# EAGLE board Player_v0.2 (EAGLE 6.2)
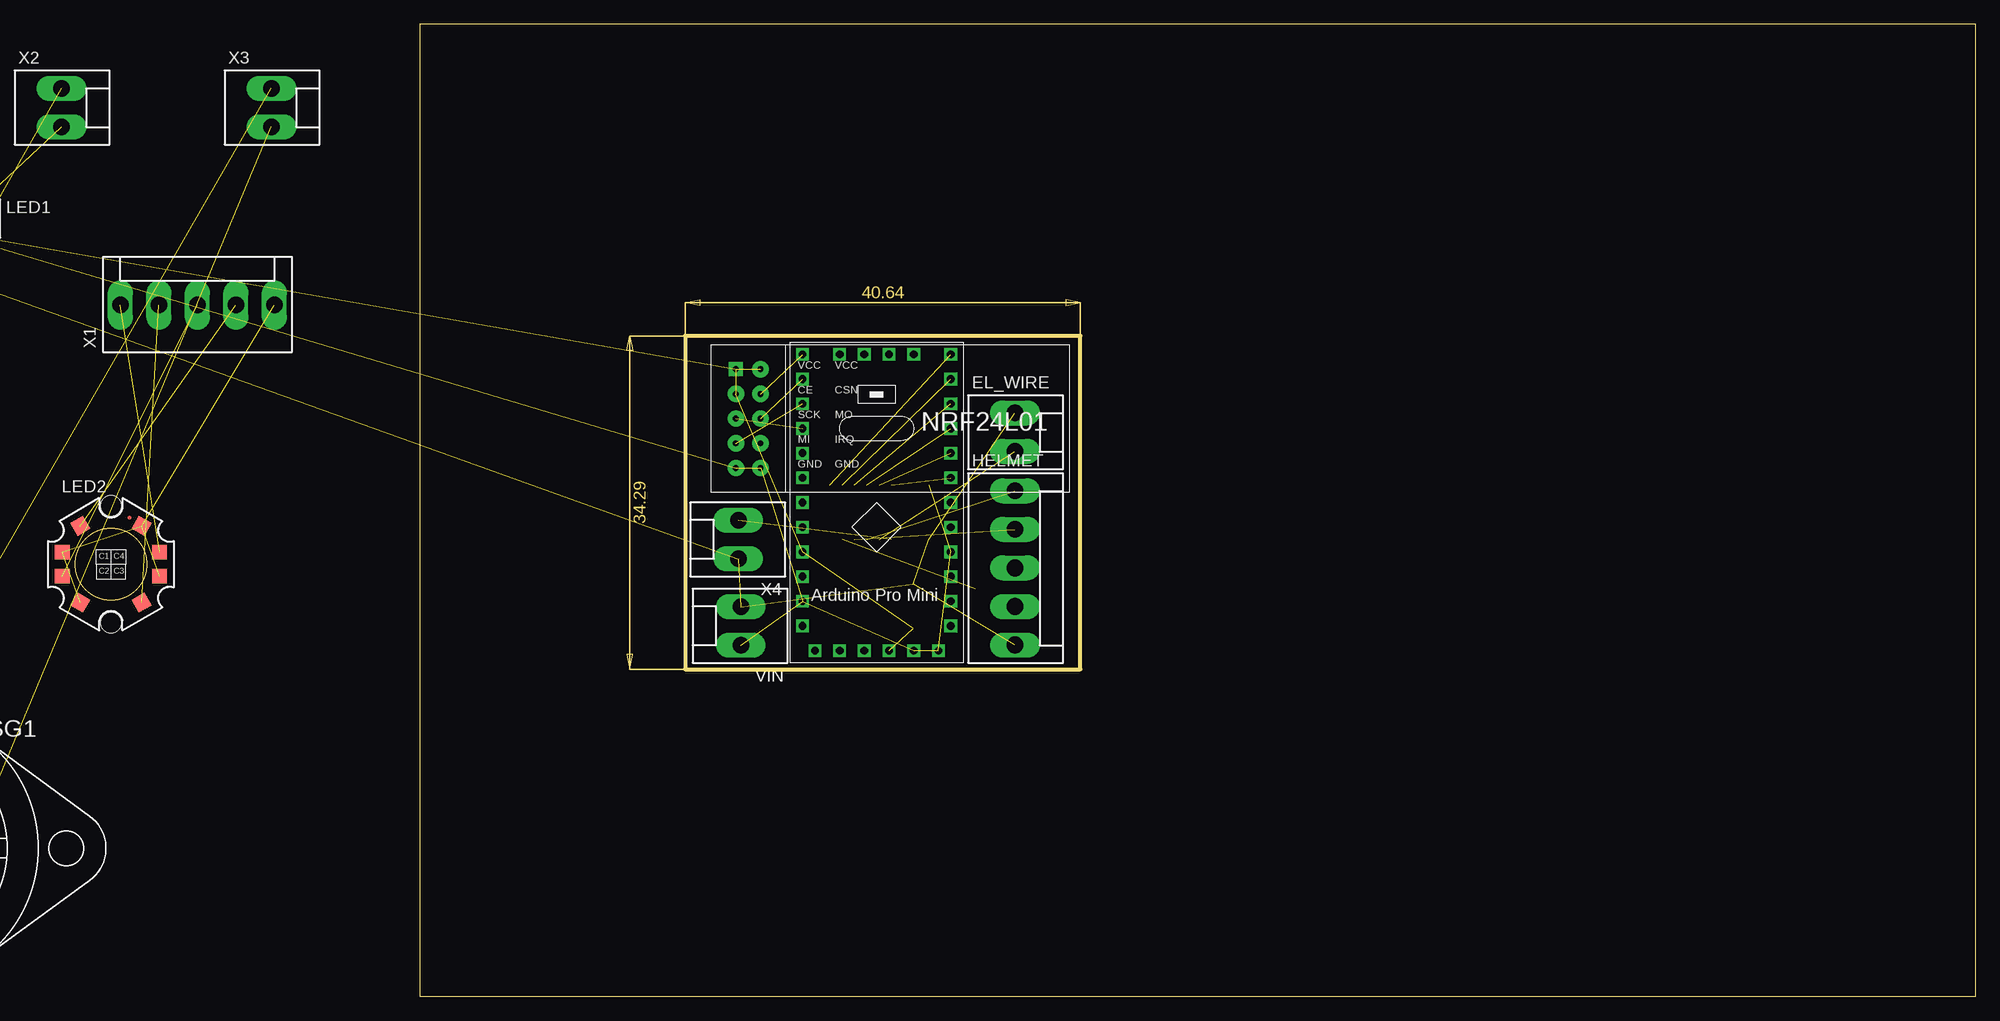
[diagram p0: board, top side]
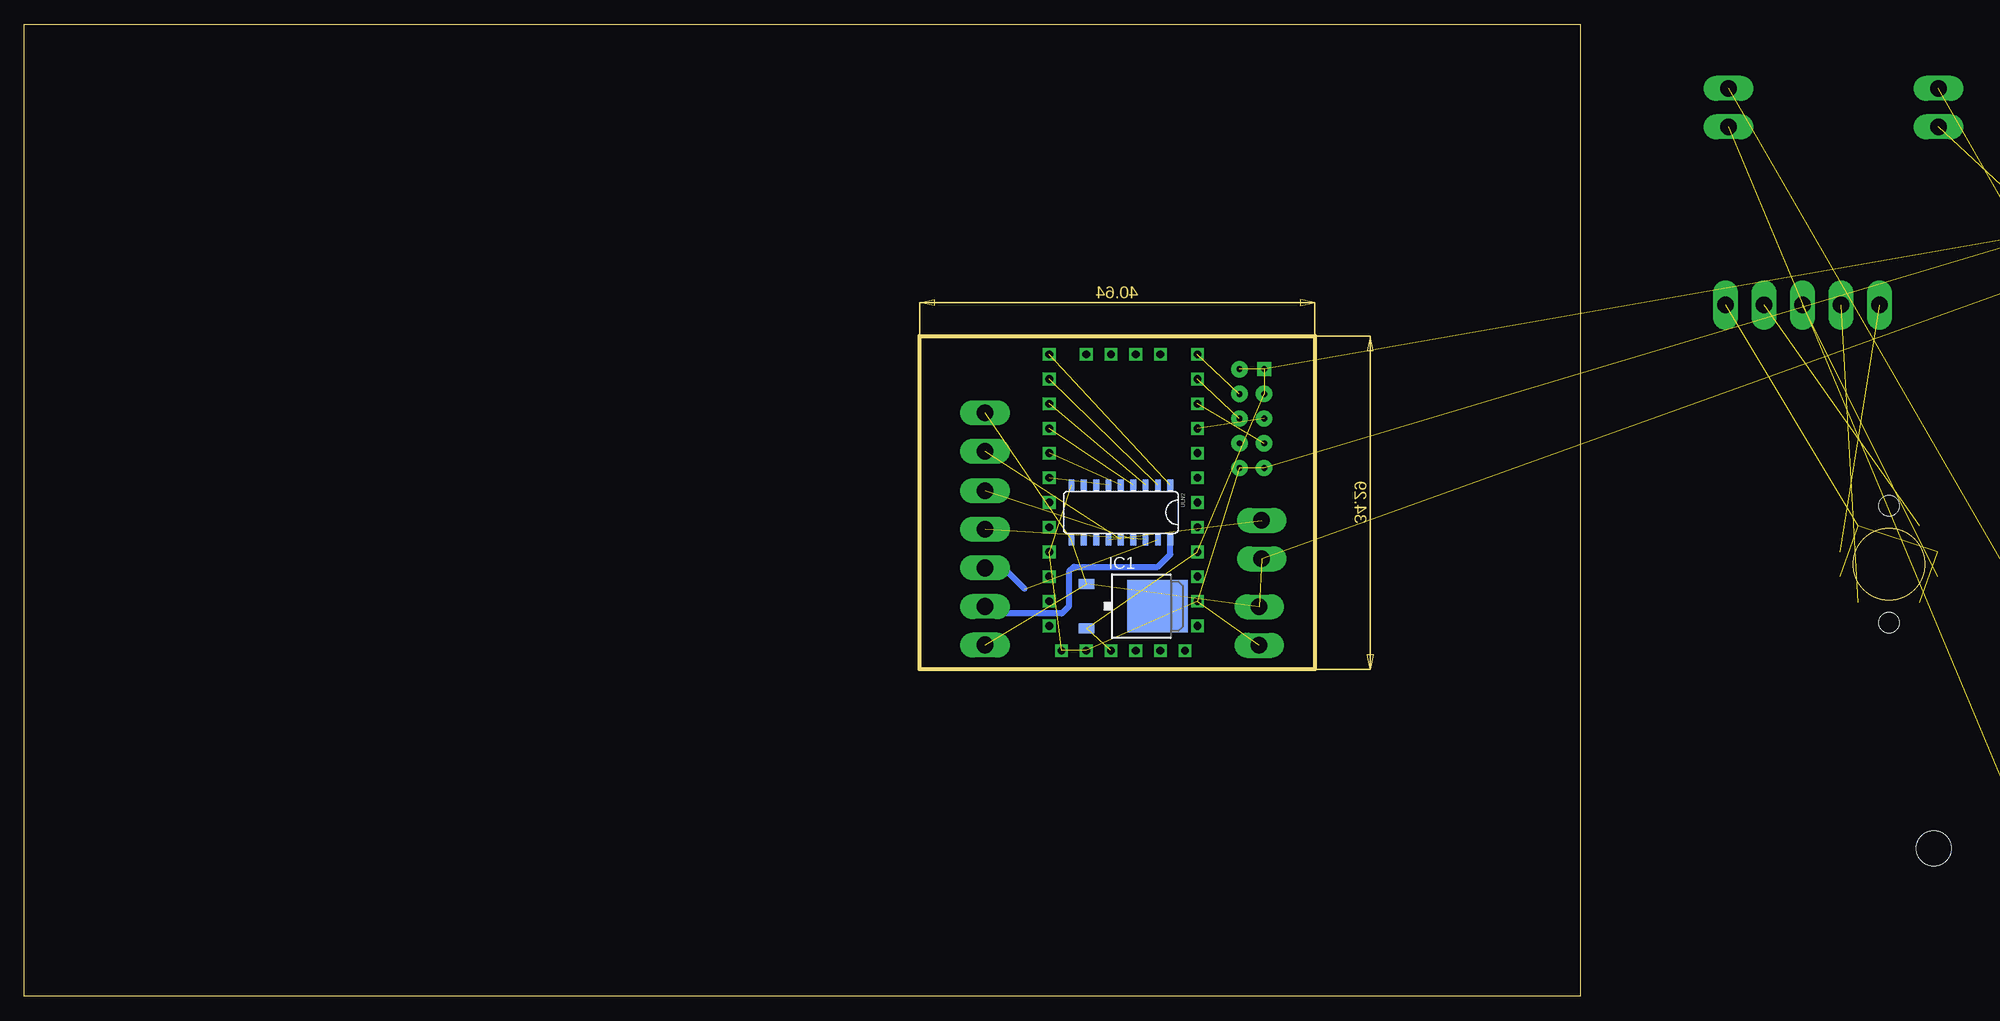
[diagram p1: board, bottom side, seen from below]

Size 160 x 100 mm. Coordinates in mm from the lower left corner, seen from the top.
Outline: 0,0 160,0 160,100 0,100 0,0
Outline: 27.3,67.94 27.3,33.66 67.94,33.66 67.94,67.94 27.3,67.94
Copper layers (1*16): Top 0.035mm / dielectric 1.5mm / Bottom 0.035mm
Design rules: minimum track width 10mil, minimum drill 24mil, track to track 8mil, track to pad 8mil, pad to pad 8mil, via to via 8mil, smd to smd 8mil, copper to edge 40mil, drill to drill 8mil, minimum pad ring 10mil, minimum via ring 8mil, stop-mask expansion 4mil, vias tented up to drill 0mil, thermal gap 10mil

## Footprints (pad centres in the part's own frame; a part is rotated, then mirrored left to right if it is on the bottom)
E2,5-5 = drill 0.813 pad 1.6: + -1.27,0 | drill 0.813 pad 1.6 octagon: - 1.27,0
KK-156-2 = drill 1.7 pad 2.184 long: 1 -1.98,0; 2 1.98,0
KK-156-5 = drill 1.7 pad 2.184 long: 1 -7.92,0; 2 -3.96,0; 3 0,0; 4 3.96,0; 5 7.92,0
TO252 = smd 1 x 1.6: 1 -2.28,-4.8; 2 2.28,-4.8 | smd 5.4 x 6.2: 3 0,2.5
LED5MM = drill 0.813 pad 1.676 octagon: A -1.27,0; K 1.27,0
ACULEDVHL = smd 1.5 x 1.5 rotated 60: 1 3.15,3.95 | smd 1.5 x 1.5: 2 5,1.25; 3 5,-1.25; 6 -5,-1.25; 7 -5,1.25 | smd 1.5 x 1.5 rotated 300: 4 3.15,-3.95 | smd 1.5 x 1.5 rotated 240: 5 -3.15,-3.95 | smd 1.5 x 1.5 rotated 120: 8 -3.15,3.95 | hole 2.1: 0,6; 0,-6
F/DB18 = drill 1.016 pad 2.54 octagon: + 7.01,0; - -7.01,0 | hole 3.607: 17.018,0; -17.018,0
ARDUINO_PRO_MINI = drill 0.8 square: A0 15.24,-20.32; A1 15.24,-17.78; A2 15.24,-15.24; A3 15.24,-12.7; A4 3.81,-30.48; A5 6.35,-30.48; A6 8.89,-30.48; A7 11.43,-30.48; D2 0,-12.7; D3 0,-15.24; D4 0,-17.78; D5 0,-20.32; D6 0,-22.86; D7 0,-25.4; D8 0,-27.94; D9 0,-30.48; D10 15.24,-30.48; D11 15.24,-27.94; D12 15.24,-25.4; D13 15.24,-22.86; DTR 13.97,0; GND 0,-10.16; GND1 15.24,-5.08; GND2 1.27,0; GND3 3.81,0; RAW 15.24,-2.54; RESET 0,-7.62; RESET1 15.24,-7.62; RXI 0,-5.08; RXI1 8.89,0; TXO 0,-2.54; TXO1 11.43,0; VCC 15.24,-10.16; VCC1 6.35,0
NRF24L01-DEALEXTREME = drill 0.6 pad 1.676: CE 0,-2.54; CSN 2.54,-2.54; GND 0,-10.16; GND_1 2.54,-10.16; IRQ 2.54,-7.62; MI 0,-7.62; MO 2.54,-5.08; SCK 0,-5.08; VCC_1 2.54,0 | drill 0.6 pad 1.422 square: VCC 0,0
SO018 = smd 0.6 x 1.2: 1 -5.08,-2.8; 2 -3.81,-2.8; 3 -2.54,-2.8; 4 -1.27,-2.8; 5 0,-2.8; 6 1.27,-2.8; 7 2.54,-2.8; 8 3.81,-2.8; 9 5.08,-2.8; 10 5.08,2.8; 11 3.81,2.8; 12 2.54,2.8; 13 1.27,2.8; 14 0,2.8; 15 -1.27,2.8; 16 -2.54,2.8; 17 -3.81,2.8; 18 -5.08,2.8

## Placement (x,y rotation side)
C1  [E2,5-5]  -54.61,80.01 0 top  (outside the outline)
C2  [E2,5-5]  -63.5,80.01 0 top  (outside the outline)
EL_WIRE  [KK-156-2]  61.21,58.04 270 top
HELMET  [KK-156-5]  61.21,44.07 270 top
IC1  7805DT  [TO252]  45.97,40.13 270 bottom
LED1  [LED5MM]  -45.72,80.01 0 top  (outside the outline)
LED2  ACULEDVHL-RGBY  [ACULEDVHL]  -31.75,44.45 0 top  (outside the outline)
SG1  F/DB18  [F/DB18]  -53.34,15.24 0 top  (outside the outline)
U$1  ARDUINO_PRO_MINI  [ARDUINO_PRO_MINI]  54.61,35.56 180 top
U$2  NRF24L01  [NRF24L01-DEALEXTREME]  32.51,64.52 0 top
ULN2  [SO018]  47.24,49.78 180 bottom
VIN  [KK-156-2]  33.02,38.1 90 top
X1  [KK-156-5]  -22.86,71.12 0 top  (outside the outline)
X2  [KK-156-2]  -36.83,91.44 270 top  (outside the outline)
X3  [KK-156-2]  -15.24,91.44 270 top  (outside the outline)
X4  [KK-156-2]  32.77,46.99 90 top

## Library data of the parts
C1 C2 = rcl
EL_WIRE HELMET VIN X1-X4 = con-molex; OC_FARNELL: unknown; OC_NEWARK: unknown
IC1 = linear
LED1 = adafruit
LED2 = led
SG1 = buzzer; OC_FARNELL: unknown; OC_NEWARK: unknown
U$1 = MimaZ
U$2 = nrf24l01_DealExtreme
ULN2 = SparkFun-PowerIC

## Nets
+12V: C2.+ EL_WIRE.1 HELMET.5 IC1.1 ULN2.10 VIN.2 X4.1
GND: C1.- C2.- U$1.GND U$1.GND1 U$1.GND2 U$1.GND3 U$2.GND U$2.GND_1 ULN2.9 VIN.1
N$1: U$1.D8 ULN2.2
N$2: U$1.D4 ULN2.6
N$3: U$1.D6 ULN2.4
N$4: U$1.D7 ULN2.3
N$5: LED2.8 X1.4
N$6: LED2.6 X1.3
N$7: LED2.4 X1.2
N$8: LED2.2 X1.1
N$9: U$1.D12 U$2.MI
N$10: U$1.D11 U$2.MO
N$11: U$1.D13 U$2.SCK
N$12: U$1.D10 U$2.CSN
N$13: HELMET.4 ULN2.18
N$14: HELMET.3 ULN2.17
N$15: HELMET.2 ULN2.16
N$16: HELMET.1 ULN2.15
N$17: EL_WIRE.2 ULN2.14
N$23: SG1.+ X3.2
N$24: SG1.- X3.1
N$25: ULN2.13 X4.2
N$26: LED1.K X2.1
N$27: LED1.A X2.2
N$28: U$1.D9 ULN2.1
N$31: LED2.1 LED2.3 LED2.5 LED2.7 X1.5
N$32: U$1.D5 ULN2.5
VCC: C1.+ IC1.2 U$1.VCC U$1.VCC1 U$2.CE U$2.VCC U$2.VCC_1

## Tracks (layer width: path | path; a pad name or v marks a point on that pad's centre or on a via)
+12V  (6 unrouted)
GND  (9 unrouted)
N$1  (1 unrouted)
N$2  (1 unrouted)
N$3  (1 unrouted)
N$4  (1 unrouted)
N$5  (1 unrouted)
N$6  (1 unrouted)
N$7  (1 unrouted)
N$8  (1 unrouted)
N$9  (1 unrouted)
N$10  (1 unrouted)
N$11  (1 unrouted)
N$12  (1 unrouted)
N$13
  Bottom 0.61: ULN2.18 42.16,45.47 43.43,44.2 52.07,44.2 52.58,43.69 52.58,40.13 53.34,39.37 60.48,39.37 HELMET.4
N$14  (1 unrouted)
  Bottom 0.61: HELMET.3 59.31,44.07 57.15,41.91
N$15  (1 unrouted)
N$16  (1 unrouted)
N$17  (1 unrouted)
N$23  (1 unrouted)
N$24  (1 unrouted)
N$25  (1 unrouted)
N$26  (1 unrouted)
N$27  (1 unrouted)
N$28  (1 unrouted)
N$31  (4 unrouted)
N$32  (1 unrouted)
VCC  (6 unrouted)